# EAGLE board RGB Interface v3 (EAGLE 9.7.0)
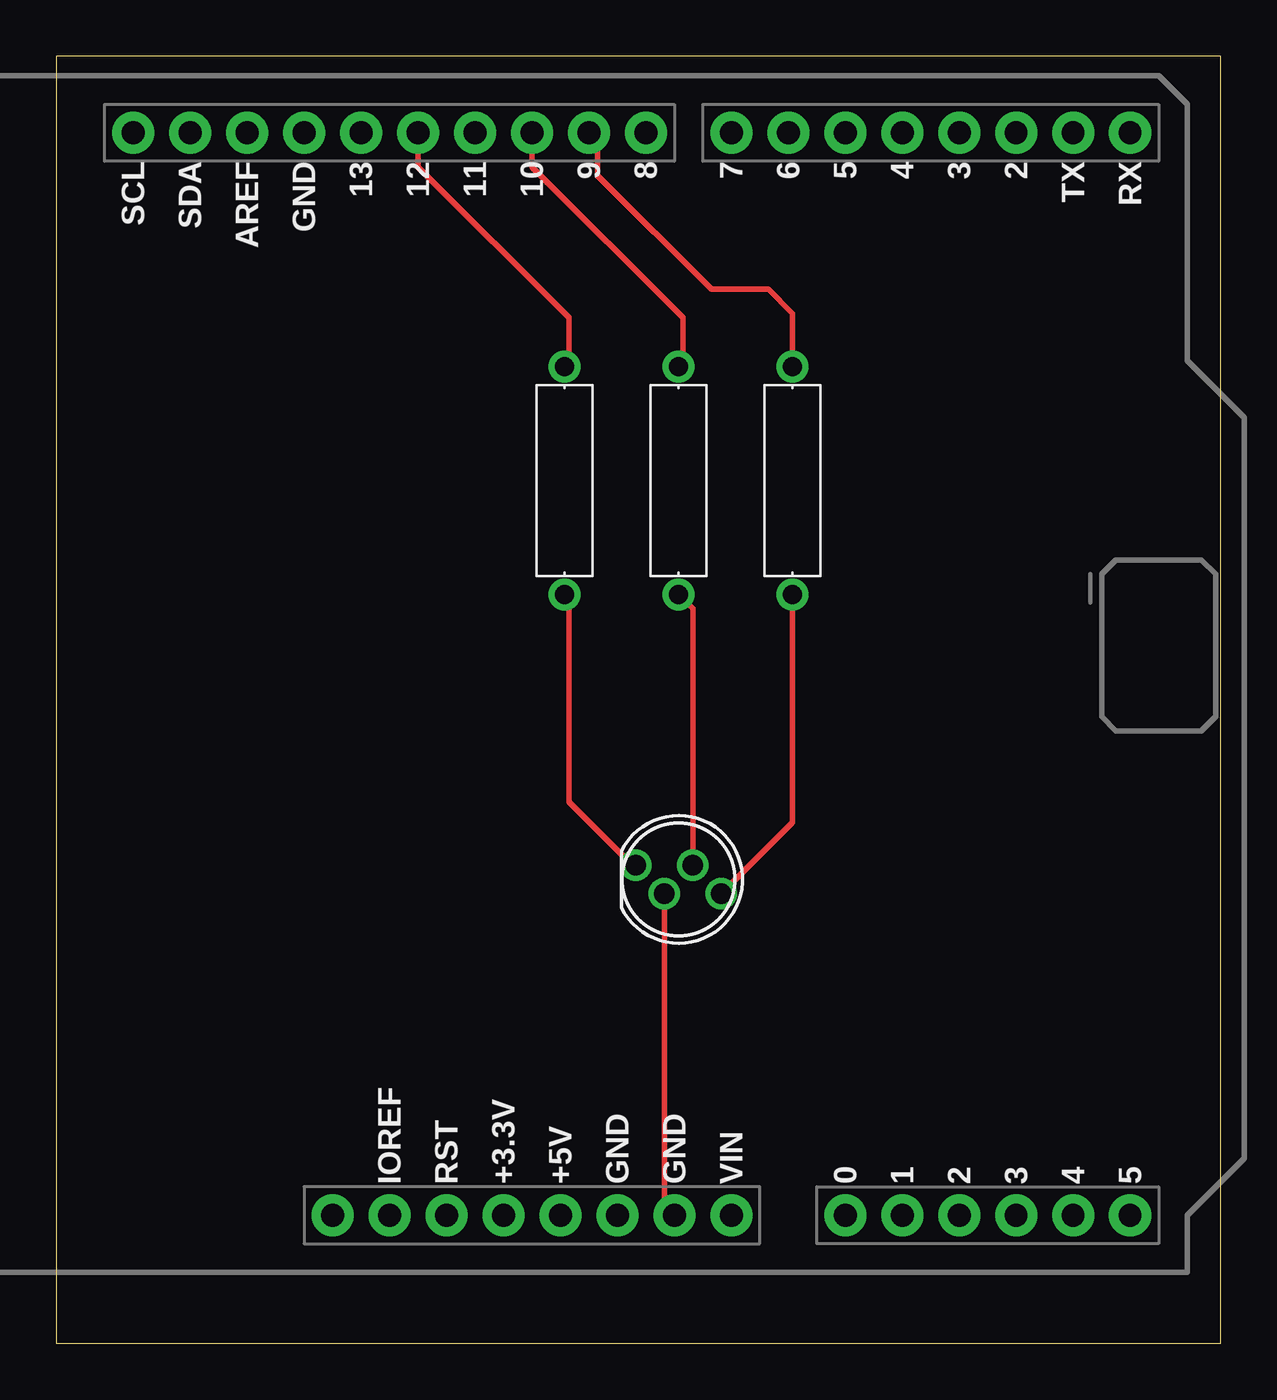
[diagram p0: board, top side]

Size 51.92 x 57.39 mm. Coordinates in mm from the lower left corner, seen from the top.
Outline: 0,57.39 0,0 51.92,0 51.92,57.39 0,57.39
Copper layers (1*16): Top 0.035mm / dielectric 1.5mm / Bottom 0.035mm
Design rules "default": minimum track width 6mil, minimum drill 0.35mm, track to track 6mil, track to pad 6mil, pad to pad 6mil, via to via 6mil, smd to smd 6mil, copper to edge 40mil, drill to drill 6mil, minimum pad ring 10mil, minimum via ring 8mil, stop-mask expansion 4mil, vias tented up to drill 0mil, thermal gap 10mil

## Footprints (pad centres in the part's own frame; a part is rotated, then mirrored left to right if it is on the bottom)
LED-RGB-5MM = drill 0.9: B 0.635,0.635; C -0.635,-0.635; G 1.905,-0.635; R -1.905,0.635
RESAD1016W63L850D250B = drill 0.83 pad 1.43: 1 -5.08,0; 2 5.08,0
ARDUINO-UNO-R3-SHIELD = drill 1.016 pad 1.88: 3.3V 24.13,-2.54; 5V 24.13,0; A0 24.13,12.7; A1 24.13,15.24; A2 24.13,17.78; A3 24.13,20.32; A4 24.13,22.86; A5 24.13,25.4; AREF -24.13,-13.97; D2 -24.13,20.32; D3 -24.13,17.78; D4 -24.13,15.24; D5 -24.13,12.7; D6 -24.13,10.16; D7 -24.13,7.62; D8 -24.13,3.81; D9 -24.13,1.27; D10 -24.13,-1.27; D11 -24.13,-3.81; D12 -24.13,-6.35; D13 -24.13,-8.89; GND@0 24.13,2.54; GND@1 24.13,5.08; GND@2 -24.13,-11.43; IOREF 24.13,-7.62; NC 24.13,-10.16; RES 24.13,-5.08; RX -24.13,25.4; SCL -24.13,-19.05; SDA -24.13,-16.51; TX -24.13,22.86; VIN 24.13,7.62

## Placement (x,y rotation side)
D1  LED-RGBRCBG-PTH  [LED-RGB-5MM]  27.75,20.69 0 top
R1  1k  [RESAD1016W63L850D250B]  22.67,38.47 270 top
R2  1k  [RESAD1016W63L850D250B]  27.75,38.47 270 top
R3  1k  [RESAD1016W63L850D250B]  32.83,38.47 270 top
U1  ARDUINO-UNO-R3-SHIELD  [ARDUINO-UNO-R3-SHIELD]  22.48,29.84 270 top

## Library data of the parts
D1 R1-R3 U1 = Tinkercad

## Nets
D1_B: D1.B R2.2
D1_G: D1.G R3.2
D1_R: D1.R R1.2
U1_D9: R3.1 U1.D9
U1_D10: R2.1 U1.D10
U1_D12: R1.1 U1.D12
U1_GND: D1.C U1.GND@1

## Tracks (layer width: path | path; a pad name or v marks a point on that pad's centre or on a via)
D1_B
  Top 0.254: R2.2 28.38,32.75 D1.B
D1_G
  Top 0.254: R3.2 32.83,23.23 D1.G
D1_R
  Top 0.254: R1.2 22.86,33.2 22.86,24.13 25.67,21.32 D1.R
U1_D9
  Top 0.254: U1.D9 24.13,53.6 24.13,52.07 29.21,46.99 31.75,46.99 32.83,45.91 R3.1
U1_D10
  Top 0.254: U1.D10 21.22,52.45 27.94,45.72 27.94,43.74 R2.1
U1_D12
  Top 0.254: U1.D12 16.13,52.45 22.86,45.72 22.86,43.74 R1.1
U1_GND
  Top 0.254: D1.C 27.11,6.17 U1.GND@1